# Altium PCB Micro_DSUB_IDC.PCBDOC
Units mm, origin at the board's own origin, x right, y up, seen from the top; angles counter-clockwise.
Board outline 16.51 x 62.86 mm, 2 copper layers (L1, L4), stack 1.57 mm thick; 4 components, 30 nets, 74 pads, 0 vias.
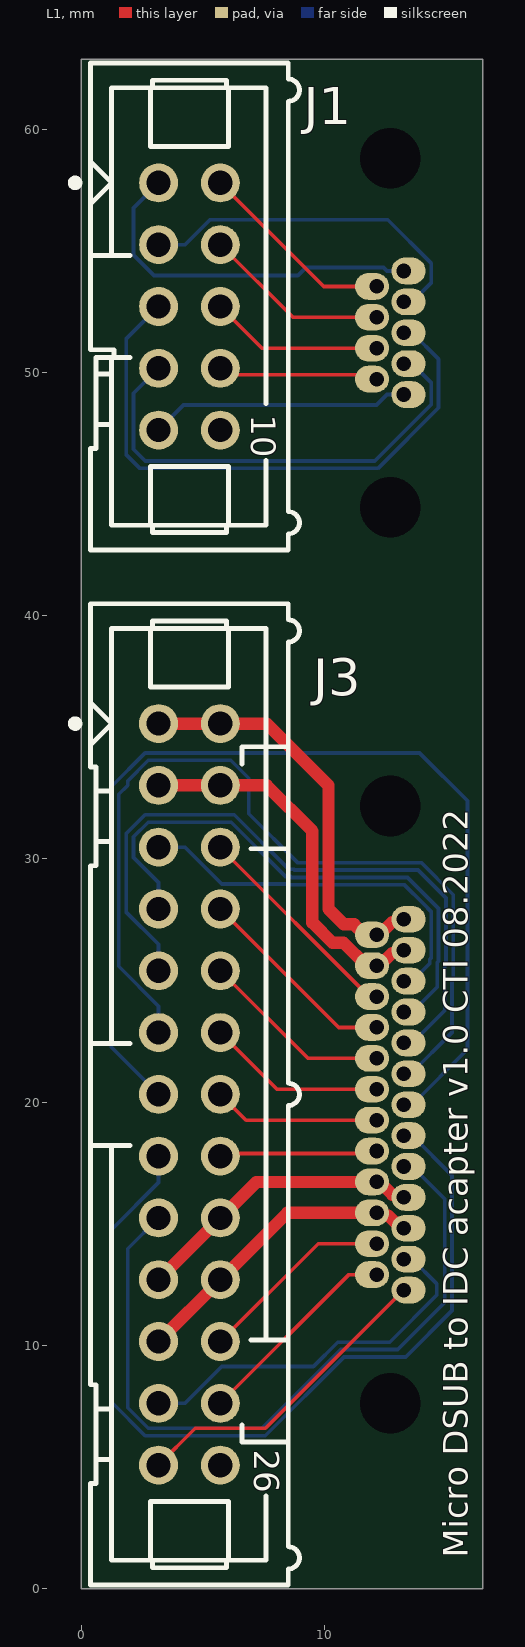
[diagram p0: L1 view]
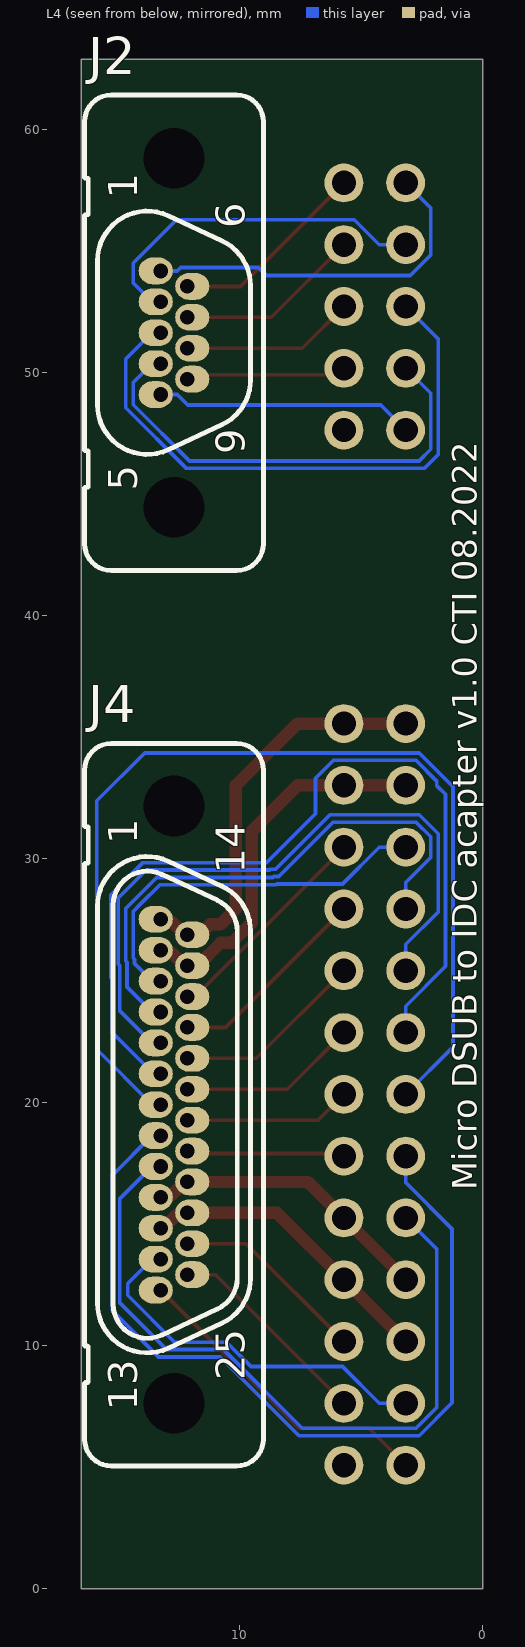
[diagram p1: L4 view, seen from below]

## Layer stack, top to bottom
Top Solder: solder mask 0.01, Solder Resist, Dk 3.5
L1: signal copper 0.035
Dielectric1: core 1.5, FR-4, Dk 4.8
L4: signal copper 0.035
Bottom Solder: solder mask 0.01, Solder Resist, Dk 3.5

## Board outline
0,0 0,62.865 16.51,62.865 16.51,0

## Design rules (kind name [scope] priority, off if disabled: settings)
BoardOutlineClearance [All] p1: gap=0.254 ignorepadtopadclearanceinfootprint=FALSE except(0: Arc-SplitContinuation Track-SplitContinuation SMDPad-SplitContinuation THPad-SplitContinuation Via-SplitContinuation Fill-SplitContinuation Poly-SplitContinuation Region-SplitContinuation Text-SplitContinuation)
Clearance [All] p1: gap=0.152 ignorepadtopadclearanceinfootprint=FALSE
ComponentClearance [All] p1: gap=0 collisioncheckmode=3 verticalgap=0.35 showdistances=FALSE
FabricationTestPointUsage TestPointUsage [All] p1: valid=0 allowmultiple=FALSE
FabricationTestpoint Testpoint [All] p1: side=3 testpointundercomponent=TRUE minsize=1.016 maxsize=2.54 preferedsize=1.524 minholesize=0 maxholesize=1.016 preferedholesize=0.813 testpointgrid=0.025 allowsidetop=TRUE allowsidebottom=TRUE usegrid=TRUE gridtolerance=0
HoleSize [All] p1: absolutevalues=TRUE maxlimit=5 minlimit=0.2 maxpercent=80.000 minpercent=20.000
HoleToHoleClearance [All] p1: gap=0.2 allowstackedmicrovias=TRUE
MinimumSolderMaskSliver [All] p1: minsoldermaskwidth=0.1
PermittedLayers [All] p1: toplayerpermitted=TRUE bottomlayerpermitted=FALSE
PlaneClearance [All] p1: clearance=0.15
PlaneConnect [All] p1: pad.planeconnectstyle=Relief pad.reliefexpansion=0.508 pad.reliefentries=4 pad.reliefconductorwidth=0.381 pad.reliefairgap=0.381 via.planeconnectstyle=Direct via.reliefexpansion=0.508 via.reliefentries=4 via.reliefconductorwidth=0.381 via.reliefairgap=0.381
PolygonConnect "Vias Direct Connect" [IsVia] p1: connectstyle=Direct reliefconductorwidth=0.254 reliefentries=4 polygonreliefangle="90 Angle" airgapwidth=0.254
PolygonConnect [All] p2: connectstyle=Relief reliefconductorwidth=0.2 reliefentries=4 polygonreliefangle="90 Angle" airgapwidth=0.15
RoomDefinition Micro_DSUB_IDC [InComponentClass('Micro_DSUB_IDC')] p1 off: confinementstyle=ConfineIn formatcopy=TRUE lockcomponents=FALSE outline 5.08,0 0,0 0,3.81 5.08,3.81
RoutingVias RoutingVias_HP [InNetClass('HP')] p1: holewidth=0.711 width=1.27 viastyle="Through Hole" minholewidth=0.711 minwidth=1.27 maxholewidth=0.711 maxwidth=1.27
RoutingVias [All] p2: holewidth=0.2 width=0.5 viastyle="Through Hole" minholewidth=0.2 minwidth=0.5 maxholewidth=0.6 maxwidth=1
SilkToSilkClearance [All] p1: silktosilkclearance=0.1
SilkToSolderMaskClearance SilkscreenOverComponentPads [IsPad] p1: minsilkscreentomaskgap=0.1 clearancetoexposedcopper=TRUE
SolderMaskExpansion [All] p1: expansion=0 istentingtop=FALSE
Width Width_HP [InNetClass('HP')] p1: maxlimit=1.27 minlimit=0.508 preferedwidth=0.762
Width [All] p2: maxlimit=2.54 minlimit=0.152 preferedwidth=0.152
20 further rules are at their usual default settings.

## Classes and differential pairs
net class HP: "FR TEC BG+" "FR TEC BG-" "FR TEC MIOB+" "FR TEC MIOB-"

## Components (designator, comment, footprint, x,y, rotation, side; value= is the part's Value field where it differs from the comment)
J1 "Header 10" 3M_N2510-6002RB 4.445,52.705 r270 top
J2 "MICRO D" NORCOMP_380-009-213L001 12.7,51.625 r90 bottom
J3 "Header 26" 3M_N2526-6002RB 4.445,20.32 r270 top
J4 "MICRO D" NORCOMP_380-025-213L001 12.7,19.895 r90 bottom

## Footprints (in the part's own frame and the unit in brackets; to place one, negate y for a bottom-side part, rotate by r counter-clockwise, add the part's x,y. Pads: shape width x height; smd on the part's side, far side on the other; paste and mask are expansions set on the pad)
3M_N2510-6002RB [mm] "10 Contacts - Straight .100\" x .100\" Low Profile Four-Wall Header"
  round 1.6 hole 1: 1(-5.08,-1.27) 2(-5.08,1.27) 3(-2.54,-1.27) 4(-2.54,1.27) 5(0,-1.27) 6(0,1.27) 7(2.54,-1.27) 8(2.54,1.27) 9(5.08,-1.27) 10(5.08,1.27)
  silkscreen extent -10.01,-4.85 10.01,4.52, body extent -10.01,-4.11 10.01,4.52, height 9.91
3M_N2526-6002RB [mm] "26 Contacts - Straight .100\" x .100\" Low Profile Four-Wall Header"
  round 1.6 hole 1: 1(-15.24,-1.27) 2(-15.24,1.27) 3(-12.7,-1.27) 4(-12.7,1.27) 5(-10.16,-1.27) 6(-10.16,1.27) 7(-7.62,-1.27) 8(-7.62,1.27) 9(-5.08,-1.27) 10(-5.08,1.27) 11(-2.54,-1.27) 12(-2.54,1.27) 13(0,-1.27) 14(0,1.27) 15(2.54,-1.27) 16(2.54,1.27) 17(5.08,-1.27) 18(5.08,1.27) 19(7.62,-1.27) 20(7.62,1.27) 21(10.16,-1.27) 22(10.16,1.27) 23(12.7,-1.27) 24(12.7,1.27) 25(15.24,-1.27) 26(15.24,1.27)
  silkscreen extent -20.17,-4.85 20.17,4.52, body extent -20.17,-4.11 20.17,4.52, height 9.91
NORCOMP_380-009-213L001 [mm] "9 Contacts, Pitch 1.27, MICRO-D VERTICAL PCB MOUNT, 380 Series"
  oval 1.1x1.4 hole 0.6 copper offset 0,0.2: 1(2.54,0.55) 2(1.27,0.55) 3(0,0.55) 4(-1.27,0.55) 5(-2.54,0.55)
  oval 1.1x1.4 hole 0.6 copper offset 0,-0.2: 6(1.905,-0.55) 7(0.635,-0.55) 8(-0.635,-0.55) 9(-1.905,-0.55)
  round 0.5 hole 2.5 unplated mask+1: 10(7.175,0) 11(-7.175,0)
  silkscreen extent -9.77,-3.68 9.77,3.68, body extent -9.77,-3.67 9.77,3.67, height 8.3
NORCOMP_380-025-213L001 [mm] "9 Contacts, Pitch 1.27, MICRO-D VERTICAL PCB MOUNT, 380 Series"
  oval 1.1x1.4 hole 0.6 copper offset 0,0.2: 1(7.62,0.55) 2(6.35,0.55) 3(5.08,0.55) 4(3.81,0.55) 5(2.54,0.55) 6(1.27,0.55) 7(0,0.55) 8(-1.27,0.55) 9(-2.54,0.55) 10(-3.81,0.55) 11(-5.08,0.55) 12(-6.35,0.55) 13(-7.62,0.55)
  oval 1.1x1.4 hole 0.6 copper offset 0,-0.2: 14(6.985,-0.55) 15(5.715,-0.55) 16(4.445,-0.55) 17(3.175,-0.55) 18(1.905,-0.55) 19(0.635,-0.55) 20(-0.635,-0.55) 21(-1.905,-0.55) 22(-3.175,-0.55) 23(-4.445,-0.55) 24(-5.715,-0.55) 25(-6.985,-0.55)
  round 0.5 hole 2.5 unplated mask+1: 26(12.275,0) 27(-12.275,0)
  silkscreen extent -14.85,-3.68 14.85,3.68, body extent -14.85,-3.67 14.85,3.67, height 8.3

## Part data
J1: library part 3M_N2510-6002RB, "Connector 10 Male", Manufacturer=3M, Manufacturer Part Number=N2510-6002RB, Author="CERN DEM JLC", Component Type=Standard, ComponentHeight=10.03mm, CreateDate=11.02.2009, Family="Header 10", HelpURL=\\cern.ch\dfs\Applications\Altium\Datasheets\3M_N2510-6002RB.pdf, LatestRevisionDate=11.08.2009, Mounted=Yes, Part Description="10 Contacts, Straight .100'' x .100'' Low Profile Four-Wall Header, 2500 Series", Part Number=3M_N2510-6002RB, Pin Count=10, PressFit=No, Sense=No, SMD=No, Socket=No, Status=None
J2: library part NORCOMP_380-009-213L001, "Connector D-sub 9 Female", Manufacturer=NORCOMP, Manufacturer Part Number=380-009-213L001, Author="CERN DEM HF", Component Type=Standard, ComponentHeight=8.5mm, CreateDate=19.05.2022, Family="MICRO D", HelpURL=\\cern.ch\dfs\Applications\Altium\Datasheets\NORCOMP_380-XXX-213L001.pdf, LatestRevisionDate=19.05.2022, Mounted=Yes, Part Description="9 Contacts, Pitch 1.27, MICRO-D VERTICAL PCB MOUNT, 380 Series", Part Number=NORCOMP_380-009-213L001, Pin Count=11, PressFit=No, Sense=No, SMD=No, Socket=No, Status="Not Recommended"
J3: library part 3M_N2526-6002RB, "Connector 26 Male", Manufacturer=3M, Manufacturer Part Number=N2526-6002RB, Author="CERN DEM JLC", Component Type=Standard, ComponentHeight=10.03mm, CreateDate=11.02.2009, Family="Header 26", HelpURL=\\cern.ch\dfs\Applications\Altium\Datasheets\3M_N2526-6002RB.pdf, LatestRevisionDate=11.08.2009, Mounted=Yes, Part Description="26 Contacts, Straight .100'' x .100'' Low Profile Four-Wall Header, 2500 Series", Part Number=3M_N2526-6002RB, Pin Count=26, PressFit=No, Sense=No, SMD=No, Socket=No, Status=None
J4: library part NORCOMP_380-025-213L001, "Connector D-sub 25 Female", Manufacturer=NORCOMP, Manufacturer Part Number=380-025-213L001, Author="CERN DEM HF", Component Type=Standard, ComponentHeight=8.5mm, CreateDate=20.05.2022, Family="MICRO D", HelpURL=\\cern.ch\dfs\Applications\Altium\Datasheets\NORCOMP_380-xxx-213L001.pdf, LatestRevisionDate=20.05.2022, Mounted=Yes, Part Description="25 Contacts, Pitch 1.27, MICRO-D VERTICAL PCB MOUNT, 380 Series", Part Number=NORCOMP_380-025-213L001, Pin Count=27, PressFit=No, Sense=No, SMD=No, Socket=No, Status="Not Recommended"

## Nets (pads, with @x,y where several pads share a name; then routed paths per layer and width w, separated by ;. In a path a pad name is that pad's centre, name@x,y a point inside that pad or via, vN(x,y) a via of type N, cw(c..) or ccw(c..) an arc to the next point about the centre after c; other vN are vias at no path point)
"FR TEC BG+": J3.20 J3.21 J4.11 J4.23 | length 12.5
  L1 w0.508: J3.21 J3.20 8.465,15.45 J4.23 12.263,15.337 12.618,15.337 13.14,14.815 J4.11
"FR TEC BG-": J3.18 J3.19 J4.10 J4.22 | length 12
  L1 w0.508: J3.19 7.195,16.72 J4.22 12.26,16.72 12.782,16.198 13.137,16.198 J4.10
"FR TEC MIOB+": J3.3 J3.4 J4.2 J4.15 | length 15.6
  L1 w0.508: J3.3 J3.4 7.62,33.02 9.5,31.14 9.5,27.378 10.327,26.551 10.777,26.551 11.717,25.61 12.26,25.61 12.782,26.132 13.137,26.132 J4.2
"FR TEC MIOB-": J3.1 J3.2 J4.1 J4.14 | length 16.9
  L1 w0.508: J3.1 J3.2 7.62,35.56 10.16,33.02 10.16,27.94 10.795,27.305 11.215,27.305 11.64,26.88 J4.14 12.26,26.88 12.782,27.402 13.137,27.402 J4.1
"FR_PD1 Anode": J1.6 J2.8 | length 7.1
  L1 w0.152: J1.6 7.43,50.99 J2.8
"FR_PD1 Kathode": J1.5 J2.3 | length 24.6
  L4 w0.152: J1.5 1.842,51.372 1.842,46.622 2.414,46.05 12.191,46.05 14.683,48.542 14.683,50.542 13.6,51.625 J2.3
"FR_PD2 Anode": J1.2 J2.6 | length 8.2
  L1 w0.152: J1.2 9.97,53.53 J2.6
"FR_PD2 Kathode": J1.1 J2.1 | length 15
  L4 w0.152: J1.1 2.147,56.756 2.147,54.819 2.991,53.975 8.902,53.975 9.236,54.309 12.423,54.309 12.566,54.165 J2.1
"FR_PD3 Anode": J1.4 J2.7 | length 7.7
  L1 w0.152: J1.4 8.7,52.26 J2.7
"FR_PD3 Kathode": J1.3 J2.2 | length 14.6
  L4 w0.152: J1.3 4.261,55.245 5.289,56.274 12.592,56.274 14.379,54.488 14.379,53.674 13.6,52.895 J2.2
"FR_Temperature Sensor 1_1": J3.15 J4.8 | length 35.8
  L4 w0.152: J3.15 3.175,16.695 1.27,14.79 1.27,7.64 2.623,6.287 7.557,6.287 10.795,9.525 13.335,9.525 15.24,11.43 15.24,16.985 13.6,18.625 J4.8
"FR_Temperature Sensor 1_2": J3.14 J4.20 | length 6.9
  L1 w0.152: J3.14 6.775,19.26 J4.20
"FR_Temperature Sensor 2_1": J3.17 J4.9 | length 30.3
  L4 w0.152: J3.17 1.905,13.97 1.905,7.436 2.749,6.591 7.43,6.591 10.669,9.83 13.005,9.83 14.935,11.76 14.935,16.02 13.6,17.355 J4.9
"FR_Temperature Sensor 2_2": J3.16 J4.21 | length 6.5
  L1 w0.152: J3.16 5.82,17.885 12.045,17.885 J4.21
"FR_Temperature Sensor 3_1": J3.25 J4.13 | length 13.1
  L1 w0.152: J3.25 4.687,6.591 7.566,6.591 J4.13
"FR_Temperature Sensor 3_2": J3.24 J4.25 | length 8.6
  L1 w0.152: J3.24 11.005,12.91 J4.25
"FR_Temperature Sensor 4_1": J3.13 J4.7 | length 43.3
  L4 w0.152: J3.13 1.232,22.263 1.232,32.963 2.623,34.353 13.907,34.353 15.875,32.385 15.875,22.17 13.6,19.895 J4.7
"FR_Temperature Sensor 4_2": J3.12 J4.19 | length 7.4
  L1 w0.152: J3.12 8.045,20.53 J4.19
"FR_Temperature Sensor 5_1": J3.7 J4.4 | length 22.7
  L4 w0.152: J3.7 3.175,29.025 2.147,30.054 2.147,30.906 2.749,31.509 6.16,31.509 8.395,29.273 8.599,29.273 8.637,29.235 13.412,29.235 14.683,27.964 14.683,25.796 14.63,25.743 14.63,24.735 13.6,23.705 J4.4
"FR_Temperature Sensor 5_2": J3.6 J4.16 | length 9
  L1 w0.152: J3.6 5.715,30.452 11.828,24.34 J4.16
"FR_Temperature Sensor 6_1": J3.11 J4.6 | length 36.4
  L4 w0.152: J3.11 3.175,23.945 1.537,25.584 1.537,32.652 1.905,33.02 1.905,33.205 2.749,34.049 6.141,34.049 6.881,33.309 6.881,31.854 8.89,29.845 13.97,29.845 15.293,28.522 15.293,25.109 15.24,25.056 15.24,22.86 13.545,21.165 J4.6
"FR_Temperature Sensor 6_2": J3.10 J4.18 | length 7.9
  L1 w0.152: J3.10 9.315,21.8 J4.18
"FR_Temperature Sensor 7_1": J3.9 J4.5 | length 28
  L4 w0.152: J3.9 3.175,26.485 1.842,27.819 1.842,31.032 2.623,31.813 6.287,31.813 8.522,29.578 8.726,29.578 8.764,29.54 13.844,29.54 14.988,28.396 14.988,25.67 14.935,25.617 14.935,23.77 13.6,22.435 J4.5
"FR_Temperature Sensor 7_2": J3.8 J4.17 | length 8.5
  L1 w0.152: J3.8 10.585,23.07 J4.17
"FR_Temperature Sensor 8_1": J3.23 J4.12 | length 15.5
  L4 w0.152: J3.23 4.261,7.62 5.772,9.131 9.539,9.131 10.542,10.135 12.675,10.135 14.605,12.065 14.605,12.54 13.6,13.545 J4.12
"FR_Temperature Sensor 8_2": J3.22 J4.24 | length 8.1
  L1 w0.152: J3.22 9.735,14.18 J4.24
NetJ1_7: J1.7 J2.4 | length 19.5
  L4 w0.152: J1.7 2.147,49.136 2.147,46.838 2.629,46.355 12.065,46.355 14.379,48.669 14.379,49.576 13.6,50.355 J2.4
NetJ1_8: J1.8 J2.9 | length 6.6
  L1 w0.152: J1.8 5.979,49.901 11.969,49.901 J2.9
NetJ1_9: J1.9 J2.5 | length 10.7
  L4 w0.152: J1.9 4.204,48.654 12.135,48.654 12.566,49.085 J2.5
NetJ3_5: J3.5 J4.3 | length 15.8
  L4 w0.152: J3.5 4.261,30.48 5.772,28.969 8.473,28.969 8.511,28.931 13.286,28.931 14.074,28.142 14.379,27.838 14.379,25.922 14.326,25.869 14.326,25.701 13.6,24.975 J4.3
pads on no net: J1.10 J2.10 J2.11 J3.26 J4.26 J4.27

## Silkscreen, mask and mechanical layers (free items; w line width, h text height)
Top Overlay:
  text "Micro DSUB to IDC acapter v1.0 CTI 08.2022" at 15.875,1.27 h1 r90
Bottom Overlay:
  text "Micro DSUB to IDC acapter v1.0 CTI 08.2022" at 0.265,16.371 h1 r270
Mechanical 1:
  the board outline again, w0.254

## Text inside footprints (layer, text, board x,y; h text height)
J1: Top Overlay "10" at 6.985,48.26 h1 r270; Mechanical 14 "10" at 6.985,48.26 h1 r270
J2: Bottom Overlay "6" at 9.8,55.925 h1.2 r270; Bottom Overlay "9" at 9.8,46.625 h1.2 r270; Bottom Overlay "1" at 14.2,57.125 h1.2 r270; Bottom Overlay "5" at 14.2,45.125 h1.2 r270
J3: Top Overlay "26" at 7.112,5.715 h1.02 r270; Mechanical 14 "26" at 7.112,5.715 h1.02 r270
J4: Bottom Overlay "1" at 14.2,30.595 h1.2 r270; Bottom Overlay "14" at 9.8,29.395 h1.2 r270; Bottom Overlay "13" at 14.2,7.315 h1.2 r270; Bottom Overlay "25" at 9.8,8.57 h1.2 r270